# Altium PCB Matrix_Buttons_v0.0.1.PcbDoc
Units mm, origin at the board's own origin, x right, y up, seen from the top; angles counter-clockwise.
Board outline 100.01 x 80 mm, 2 copper layers (Top Layer, Bottom Layer), stack 0.471 mm thick; 50 components, 14 nets, 210 pads, 56 vias.
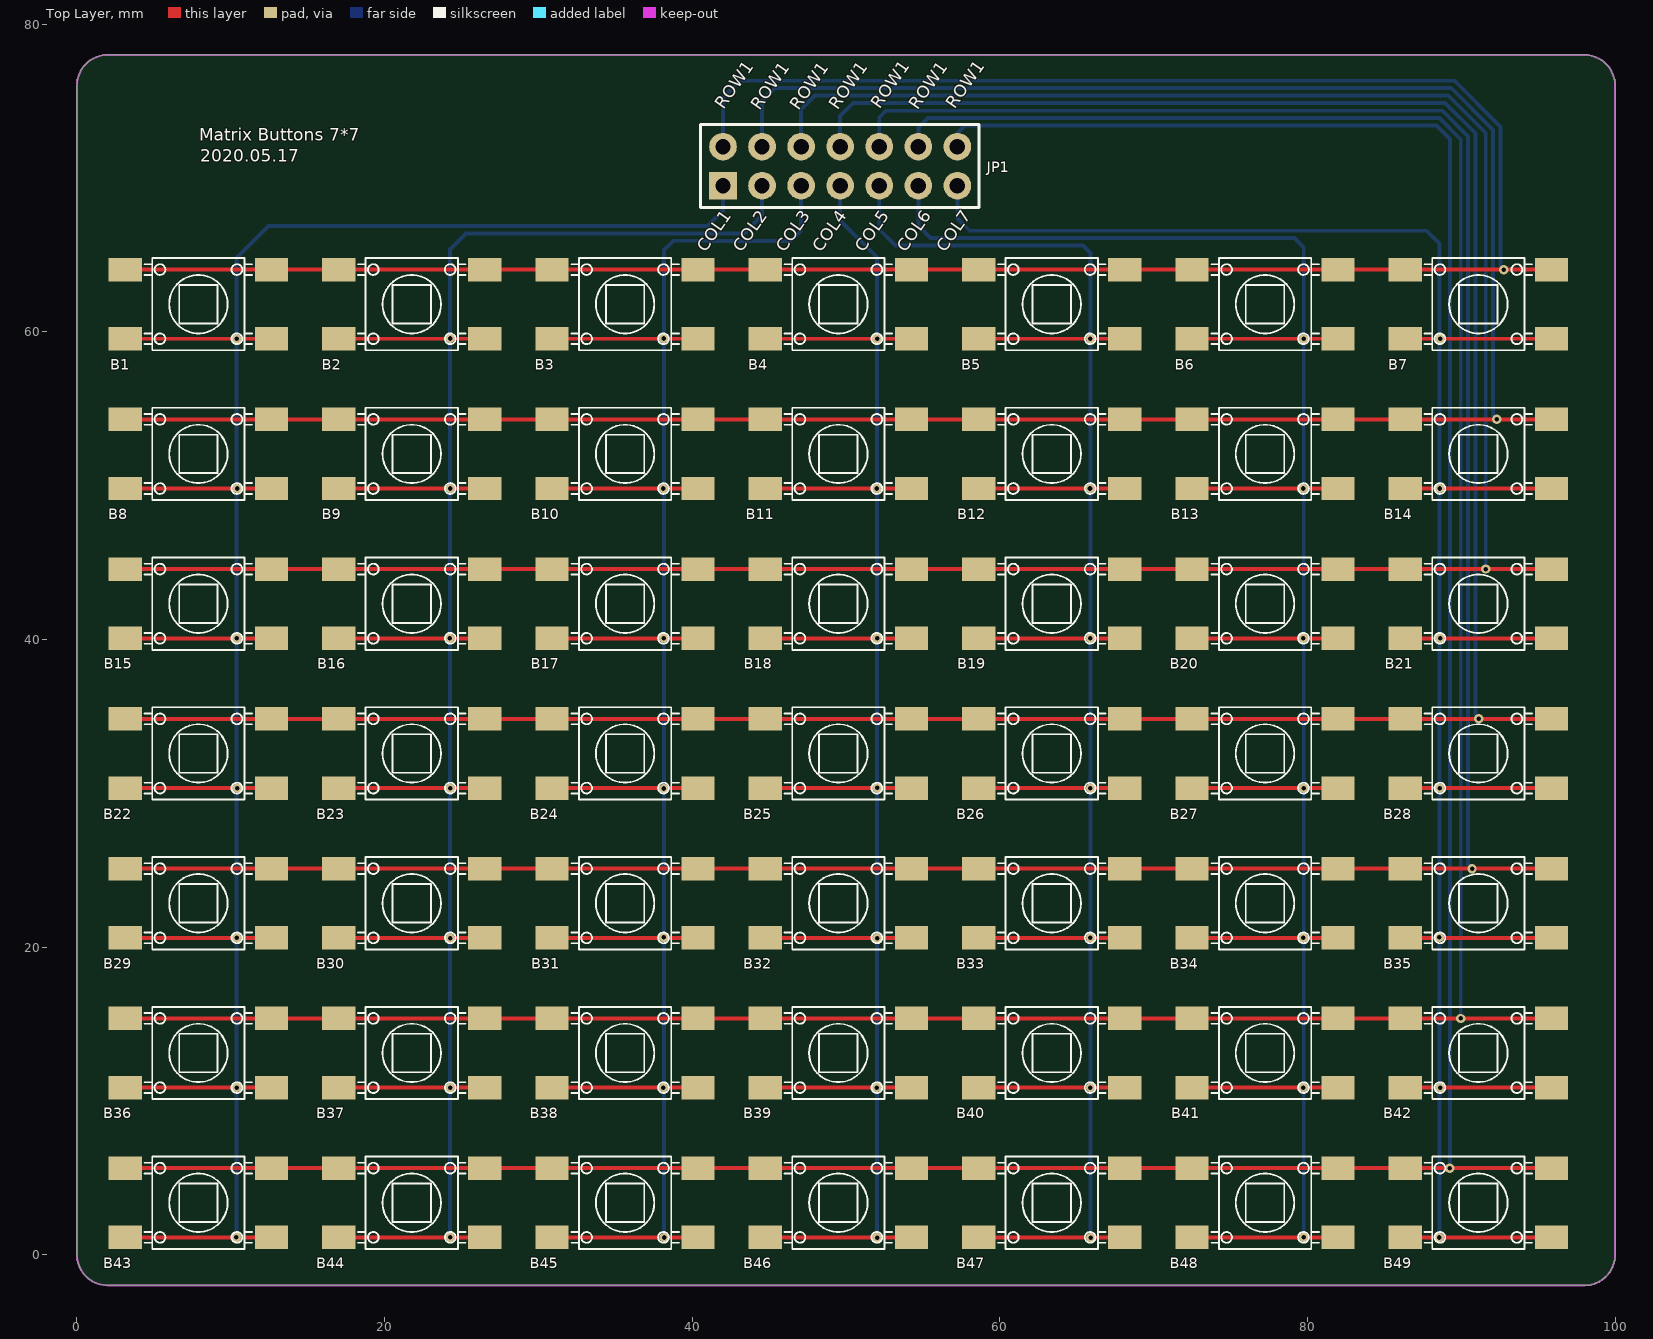
[diagram p0: Top Layer view]
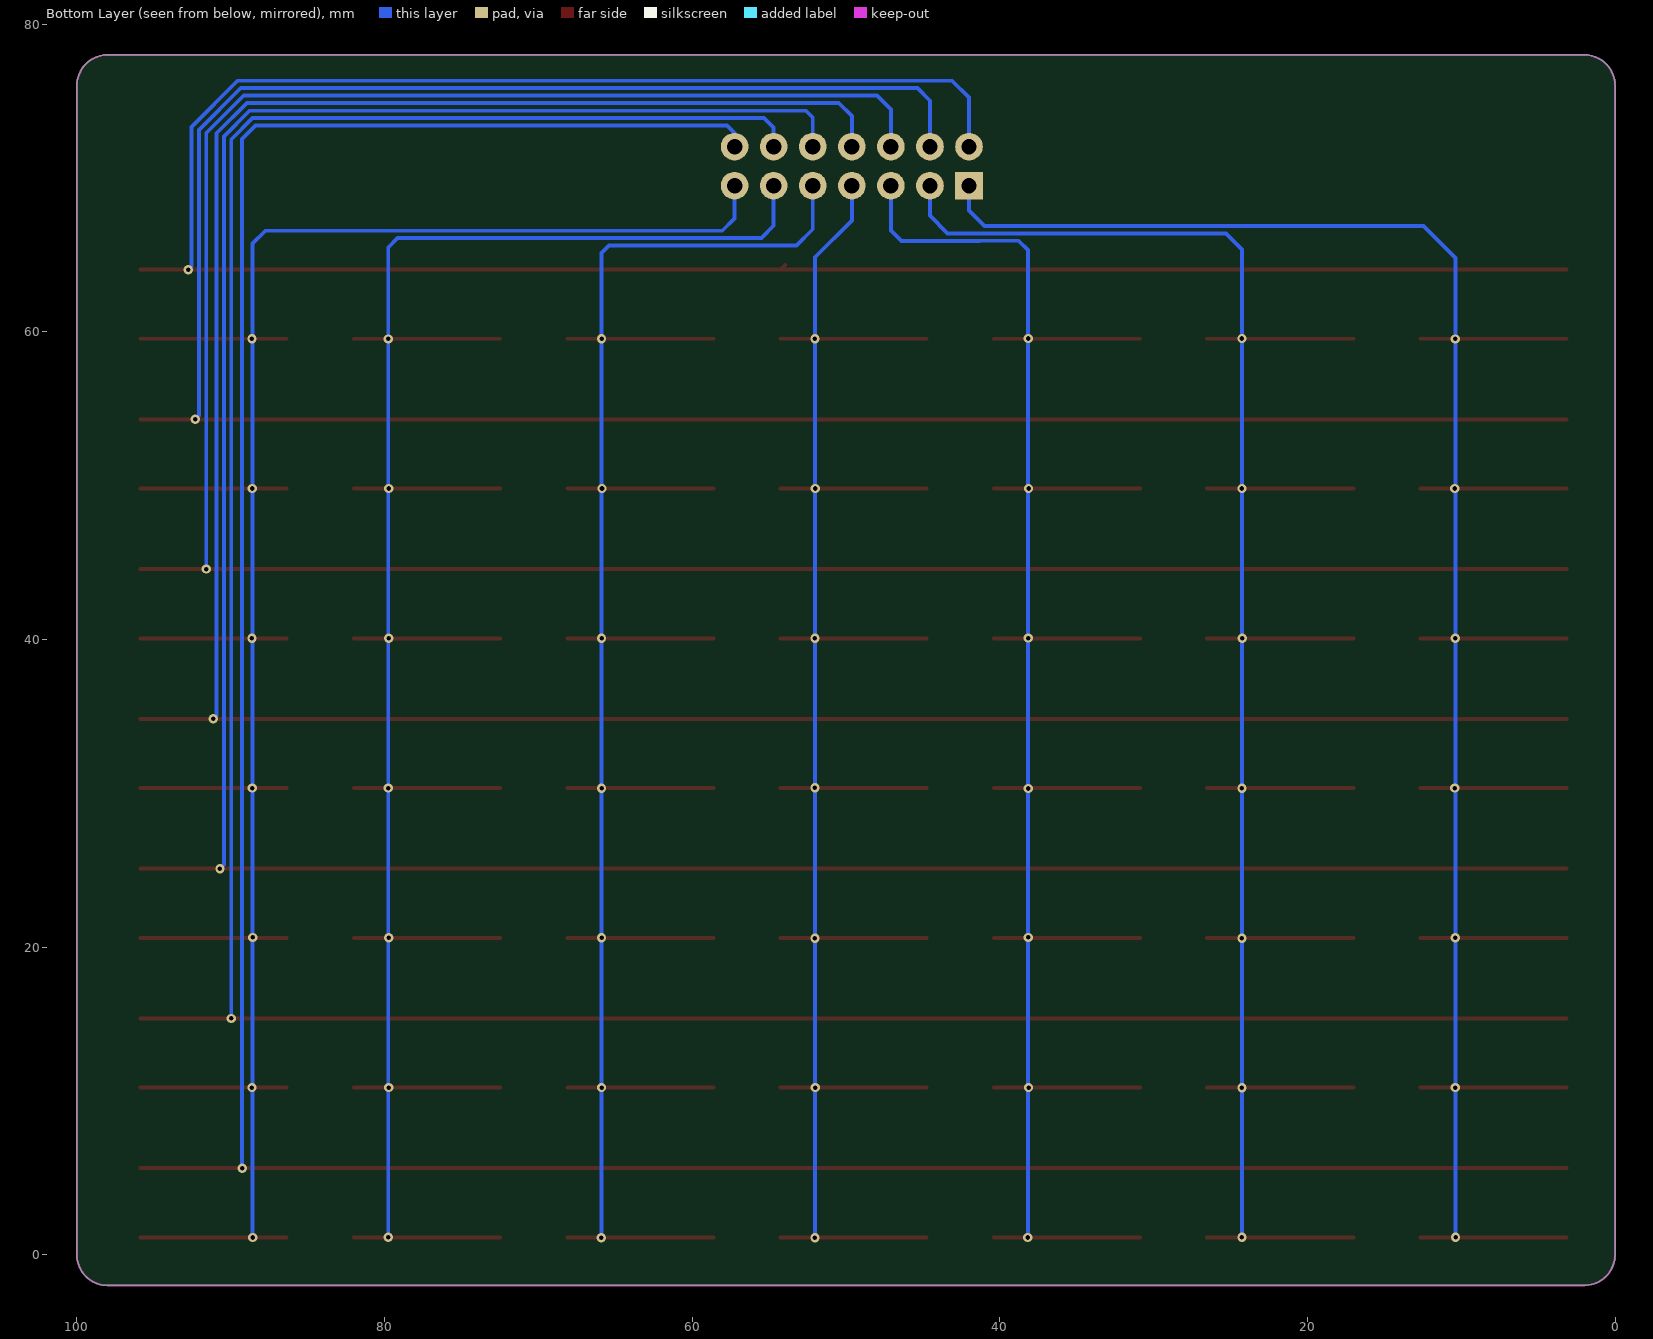
[diagram p1: Bottom Layer view, seen from below]
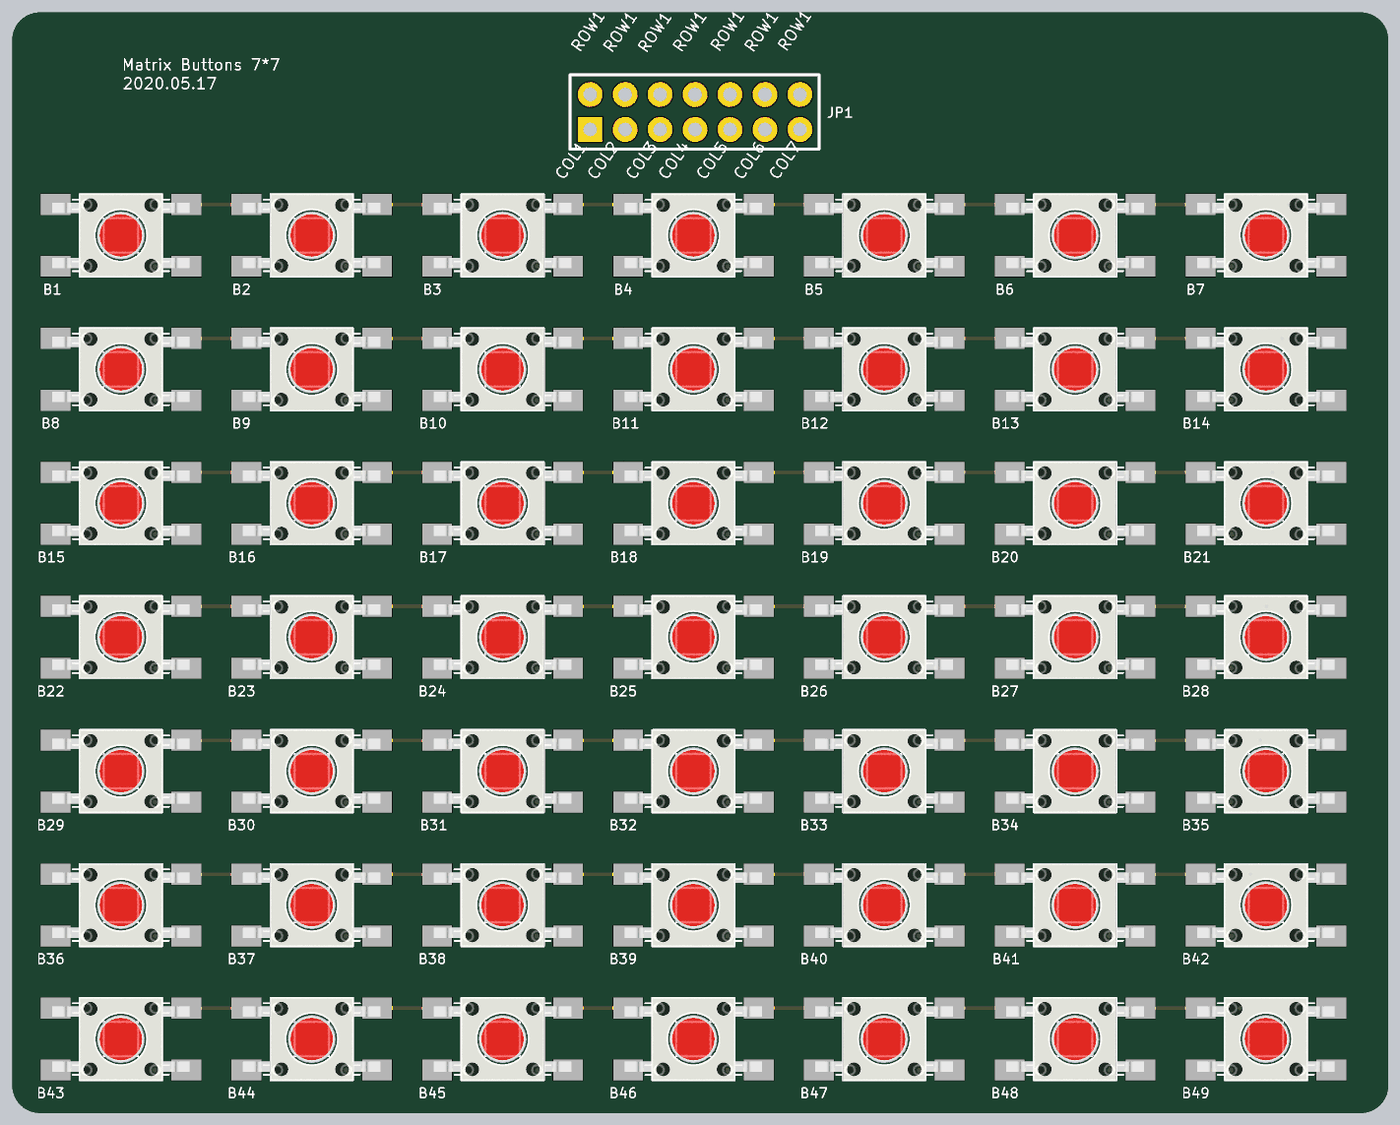
[diagram p2: 3D render of the assembled board from above, using the file's embedded part models]

## Layer stack, top to bottom
Top Solder: solder mask 0.0102, Solder Resist, Dk 3.5
Top Layer: signal copper 0.0356
Dielectric1: core 0.4, FR-4, Dk 4.8
Bottom Layer: signal copper 0.0356
Bottom Solder: solder mask 0.0102, Solder Resist, Dk 3.5

## Board outline
-0.005,0 -0.005,76 -0.004,76 cw(c1.996,76) 1.996,78 98,78 cw(c98,76) 100,76 100,-0.004 cw(c98,-0.004) 98,-2.004 1.996,-2.004 2,-2 cw(c2,0)

## Design rules (kind name [scope] priority, off if disabled: settings)
Clearance "U9 PWR TRACK" [(ObjectKind = 'Track') vs (ObjectKind = 'Pad') And (Component = 'U9')] p1: gap=0.203
Clearance "U8 PWR TRACK" [(ObjectKind = 'Track') vs (ObjectKind = 'Pad') And (Component = 'U8')] p2: gap=0.203
Clearance SB [(HasFootprint('SB_0603')) or (HasFootprint('JP2_SMD'))] p3: gap=0.127
Clearance CN1_PAD [(ObjectKind = 'Pad') And (Component = 'CN1') vs (ObjectKind = 'Pad') And (Component = 'CN1')] p4: gap=0.203
Clearance U6_PAD [(ObjectKind = 'Pad') And (Component = 'D6') vs (ObjectKind = 'Pad') And (Component = 'D6')] p5: gap=0.203
Clearance CN13_PAD [(ObjectKind = 'Pad') And (Component = 'CN13') vs (ObjectKind = 'Pad') And (Component = 'CN13')] p6: gap=0.178
Clearance U9_PAD [(ObjectKind = 'Pad') And (Component = 'U9') vs (ObjectKind = 'Pad') And (Component = 'U9')] p7: gap=0.203
Clearance U8_PAD [(ObjectKind = 'Pad') And (Component = 'U8') vs (ObjectKind = 'Pad') And (Component = 'U8')] p8: gap=0.198
Clearance Polygon [(ObjectKind = 'Poly')] p9: gap=0.254
Clearance [All] p10: gap=0.226
DiffPairsRouting [All] p1: maxlimit=0.254 minlimit=0.226 mostfreqgap=0.226 toplayer_minwidth=0.381 toplayer_maxwidth=0.381 toplayer_prefwidth=0.381 bottomlayer_minwidth=0.381 bottomlayer_maxwidth=0.381 bottomlayer_prefwidth=0.381 maxuncoupledlength=12.7
FabricationTestPointUsage TestPointUsage [All] p1: valid=0 allowmultiple=FALSE
FabricationTestpoint Testpoint [(IsPad And (OnTopLayer Or OnBottomLayer))] p1: side=3 testpointundercomponent=TRUE minsize=1.016 maxsize=2.54 preferedsize=1.524 minholesize=0 maxholesize=1.016 preferedholesize=0.813 testpointgrid=0.025 allowsidetop=TRUE allowsidebottom=TRUE usegrid=TRUE gridtolerance=0
HoleSize [All] p1: absolutevalues=TRUE maxlimit=3.81 minlimit=0.025 maxpercent=80.000 minpercent=20.000
MinimumSolderMaskSliver [All] p1: minsoldermaskwidth=0.013
PolygonConnect VBAT [(ObjectKind = 'Poly') And (Net = 'VBAT')] p1: connectstyle=Direct reliefconductorwidth=0.254 reliefentries=4 polygonreliefangle="90 Angle" airgapwidth=0.254
PolygonConnect VDD [(ObjectKind = 'Poly') And (Net = 'VDD')] p2: connectstyle=Direct reliefconductorwidth=0.254 reliefentries=4 polygonreliefangle="90 Angle" airgapwidth=0.254
PolygonConnect VIN [(ObjectKind = 'Poly') And (Net = 'VIN')] p3: connectstyle=Direct reliefconductorwidth=0.254 reliefentries=4 polygonreliefangle="90 Angle" airgapwidth=0.254
PolygonConnect +3V3 [(ObjectKind = 'Poly') And (Net = '+3V3')] p4: connectstyle=Direct reliefconductorwidth=0.254 reliefentries=4 polygonreliefangle="90 Angle" airgapwidth=0.254
PolygonConnect E5V [(ObjectKind = 'Poly') And (Net = 'E5V')] p5: connectstyle=Direct reliefconductorwidth=0.254 reliefentries=4 polygonreliefangle="90 Angle" airgapwidth=0.254
PolygonConnect +5V [(ObjectKind = 'Poly') And (Net = '+5V')] p6: connectstyle=Direct reliefconductorwidth=0.254 reliefentries=4 polygonreliefangle="90 Angle" airgapwidth=0.254
PolygonConnect U5V [(ObjectKind = 'Poly') And (Net = 'NetC17_2')] p7: connectstyle=Direct reliefconductorwidth=0.254 reliefentries=4 polygonreliefangle="90 Angle" airgapwidth=0.254
PolygonConnect VIA [IsVia] p8: connectstyle=Direct reliefconductorwidth=0.508 reliefentries=4 polygonreliefangle="90 Angle" airgapwidth=0.254
PolygonConnect [All] p9: connectstyle=Relief reliefconductorwidth=0.254 reliefentries=4 polygonreliefangle="90 Angle" airgapwidth=0.254
RoomDefinition Matrix_Buttons_v0.0.1 [InComponentClass('Matrix_Buttons_v0.0.1')] p1: confinementstyle=ConfineIn formatcopy=TRUE lockcomponents=FALSE outline -1249.589,-912.916 -1198.789,-912.916 -1198.789,-887.516 -1249.589,-887.516
RoutingLayers [All] p1: top layer_v5=FALSE bottom layer_v5=FALSE
RoutingVias [All] p1: holewidth=0.305 width=0.508 viastyle="Through Hole" minholewidth=0.203 minwidth=0.381 maxholewidth=0.711 maxwidth=1.27
SilkToSilkClearance [All] p1: silktosilkclearance=0.102
SilkToSolderMaskClearance SilkscreenOverComponentPads [IsPad] p1: minsilkscreentomaskgap=0.102 clearancetoexposedcopper=TRUE
SolderMaskExpansion [All] p1: expansion=0.102
Width PWR [InNetClass('PWR')] p1: maxlimit=2.54 minlimit=0.203 preferedwidth=0.254 bottomlayer_minwidth=0.254 minimp=50.000000 maximp=50.000000 favimp=50.000000
Width [All] p2: maxlimit=2.54 minlimit=0.127 preferedwidth=0.254 minimp=50.000000 maximp=50.000000 favimp=50.000000
22 further rules are at their usual default settings.

## Components (designator, comment, footprint, x,y, rotation, side; value= is the part's Value field where it differs from the comment)
B1 "SW-PUSH-CMS_BLACK" "SWI_WEALTHMETAL_TD-0341_4P - BACK" 7.896,61.793 r270 top
B2 "SW-PUSH-CMS_BLACK" "SWI_WEALTHMETAL_TD-0341_4P - BACK" 21.765,61.793 r270 top
B3 "SW-PUSH-CMS_BLACK" "SWI_WEALTHMETAL_TD-0341_4P - BACK" 35.634,61.793 r270 top
B4 "SW-PUSH-CMS_BLACK" "SWI_WEALTHMETAL_TD-0341_4P - BACK" 49.503,61.793 r270 top
B5 "SW-PUSH-CMS_BLACK" "SWI_WEALTHMETAL_TD-0341_4P - BACK" 63.371,61.793 r270 top
B6 "SW-PUSH-CMS_BLACK" "SWI_WEALTHMETAL_TD-0341_4P - BACK" 77.24,61.793 r270 top
B7 "SW-PUSH-CMS_BLACK" "SWI_WEALTHMETAL_TD-0341_4P - BACK" 91.109,61.793 r270 top
B8 "SW-PUSH-CMS_BLACK" "SWI_WEALTHMETAL_TD-0341_4P - BACK" 7.896,52.057 r270 top
B9 "SW-PUSH-CMS_BLACK" "SWI_WEALTHMETAL_TD-0341_4P - BACK" 21.765,52.057 r270 top
B10 "SW-PUSH-CMS_BLACK" "SWI_WEALTHMETAL_TD-0341_4P - BACK" 35.634,52.057 r270 top
B11 "SW-PUSH-CMS_BLACK" "SWI_WEALTHMETAL_TD-0341_4P - BACK" 49.503,52.057 r270 top
B12 "SW-PUSH-CMS_BLACK" "SWI_WEALTHMETAL_TD-0341_4P - BACK" 63.371,52.057 r270 top
B13 "SW-PUSH-CMS_BLACK" "SWI_WEALTHMETAL_TD-0341_4P - BACK" 77.24,52.057 r270 top
B14 "SW-PUSH-CMS_BLACK" "SWI_WEALTHMETAL_TD-0341_4P - BACK" 91.109,52.057 r270 top
B15 "SW-PUSH-CMS_BLACK" "SWI_WEALTHMETAL_TD-0341_4P - BACK" 7.896,42.32 r270 top
B16 "SW-PUSH-CMS_BLACK" "SWI_WEALTHMETAL_TD-0341_4P - BACK" 21.765,42.32 r270 top
B17 "SW-PUSH-CMS_BLACK" "SWI_WEALTHMETAL_TD-0341_4P - BACK" 35.634,42.32 r270 top
B18 "SW-PUSH-CMS_BLACK" "SWI_WEALTHMETAL_TD-0341_4P - BACK" 49.503,42.32 r270 top
B19 "SW-PUSH-CMS_BLACK" "SWI_WEALTHMETAL_TD-0341_4P - BACK" 63.371,42.32 r270 top
B20 "SW-PUSH-CMS_BLACK" "SWI_WEALTHMETAL_TD-0341_4P - BACK" 77.24,42.32 r270 top
B21 "SW-PUSH-CMS_BLACK" "SWI_WEALTHMETAL_TD-0341_4P - BACK" 91.109,42.32 r270 top
B22 "SW-PUSH-CMS_BLACK" "SWI_WEALTHMETAL_TD-0341_4P - BACK" 7.896,32.583 r270 top
B23 "SW-PUSH-CMS_BLACK" "SWI_WEALTHMETAL_TD-0341_4P - BACK" 21.765,32.583 r270 top
B24 "SW-PUSH-CMS_BLACK" "SWI_WEALTHMETAL_TD-0341_4P - BACK" 35.634,32.583 r270 top
B25 "SW-PUSH-CMS_BLACK" "SWI_WEALTHMETAL_TD-0341_4P - BACK" 49.503,32.583 r270 top
B26 "SW-PUSH-CMS_BLACK" "SWI_WEALTHMETAL_TD-0341_4P - BACK" 63.371,32.583 r270 top
B27 "SW-PUSH-CMS_BLACK" "SWI_WEALTHMETAL_TD-0341_4P - BACK" 77.24,32.583 r270 top
B28 "SW-PUSH-CMS_BLACK" "SWI_WEALTHMETAL_TD-0341_4P - BACK" 91.109,32.583 r270 top
B29 "SW-PUSH-CMS_BLACK" "SWI_WEALTHMETAL_TD-0341_4P - BACK" 7.896,22.847 r270 top
B30 "SW-PUSH-CMS_BLACK" "SWI_WEALTHMETAL_TD-0341_4P - BACK" 21.765,22.847 r270 top
B31 "SW-PUSH-CMS_BLACK" "SWI_WEALTHMETAL_TD-0341_4P - BACK" 35.634,22.847 r270 top
B32 "SW-PUSH-CMS_BLACK" "SWI_WEALTHMETAL_TD-0341_4P - BACK" 49.503,22.847 r270 top
B33 "SW-PUSH-CMS_BLACK" "SWI_WEALTHMETAL_TD-0341_4P - BACK" 63.371,22.847 r270 top
B34 "SW-PUSH-CMS_BLACK" "SWI_WEALTHMETAL_TD-0341_4P - BACK" 77.24,22.847 r270 top
B35 "SW-PUSH-CMS_BLACK" "SWI_WEALTHMETAL_TD-0341_4P - BACK" 91.109,22.847 r270 top
B36 "SW-PUSH-CMS_BLACK" "SWI_WEALTHMETAL_TD-0341_4P - BACK" 7.896,13.11 r270 top
B37 "SW-PUSH-CMS_BLACK" "SWI_WEALTHMETAL_TD-0341_4P - BACK" 21.765,13.11 r270 top
B38 "SW-PUSH-CMS_BLACK" "SWI_WEALTHMETAL_TD-0341_4P - BACK" 35.634,13.11 r270 top
B39 "SW-PUSH-CMS_BLACK" "SWI_WEALTHMETAL_TD-0341_4P - BACK" 49.503,13.11 r270 top
B40 "SW-PUSH-CMS_BLACK" "SWI_WEALTHMETAL_TD-0341_4P - BACK" 63.371,13.11 r270 top
B41 "SW-PUSH-CMS_BLACK" "SWI_WEALTHMETAL_TD-0341_4P - BACK" 77.24,13.11 r270 top
B42 "SW-PUSH-CMS_BLACK" "SWI_WEALTHMETAL_TD-0341_4P - BACK" 91.109,13.11 r270 top
B43 "SW-PUSH-CMS_BLACK" "SWI_WEALTHMETAL_TD-0341_4P - BACK" 7.896,3.373 r270 top
B44 "SW-PUSH-CMS_BLACK" "SWI_WEALTHMETAL_TD-0341_4P - BACK" 21.765,3.373 r270 top
B45 "SW-PUSH-CMS_BLACK" "SWI_WEALTHMETAL_TD-0341_4P - BACK" 35.634,3.373 r270 top
B46 "SW-PUSH-CMS_BLACK" "SWI_WEALTHMETAL_TD-0341_4P - BACK" 49.503,3.373 r270 top
B47 "SW-PUSH-CMS_BLACK" "SWI_WEALTHMETAL_TD-0341_4P - BACK" 63.371,3.373 r270 top
B48 "SW-PUSH-CMS_BLACK" "SWI_WEALTHMETAL_TD-0341_4P - BACK" 77.24,3.373 r270 top
B49 "SW-PUSH-CMS_BLACK" "SWI_WEALTHMETAL_TD-0341_4P - BACK" 91.109,3.373 r270 top
JP1 "HEADER_2X7" "Header M 2x7x2.54 TH V" 42,69.494 r0 top

## Footprints (in the part's own frame and the unit in brackets; to place one, negate y for a bottom-side part, rotate by r counter-clockwise, add the part's x,y. Pads: shape width x height; smd on the part's side, far side on the other; paste and mask are expansions set on the pad)
"Header M 2x7x2.54 TH V" [mm] "2x5x2.54 Header TH V Male"
  rect 1.8x1.8 hole 1: 1(0,0)
  round 1.8 hole 1: 2(0,2.54) 3(2.54,0) 4(2.54,2.54) 5(5.08,0) 6(5.08,2.54) 7(7.62,0) 8(7.62,2.54) 9(10.16,0) 10(10.16,2.54) 11(12.7,0) 12(12.7,2.54) 13(15.24,0) 14(15.24,2.54)
  silkscreen extent -1.47,-1.43 16.64,3.97
"SWI_WEALTHMETAL_TD-0341_4P - BACK" [mm] "SMD Push Button with Back Plastic"
  rect 1.52x2.16 smd mask+0.05: 1(-2.25,4.75) 1(-2.25,-4.75) 2(2.25,4.75) 2(2.25,-4.75)
  silkscreen extent -3,-3.5 3,3.5, body extent -3,-5 3,5, height 6

## Part data
B1 B2 B3 B4 B5 B6 B7 B8 B9 B10 B11 B12 B13 B14 B15 B16 B17 B18 B19 B20 B21 B22 B23 B24 B25 B26 B27 B28 B29 B30 B31 B32 B33 B34 B35 B36 B37 B38 B39 B40 B41 B42 B43 B44 B45 B46 B47 B48 B49: library part SW-PB_2, "Push-button SMD"

## Via types
v1: diameter 0.6, hole 0.3, Top Layer to Bottom Layer, tented both sides, 56 vias

## Nets (pads, with @x,y where several pads share a name; then routed paths per layer and width w, separated by ;. In a path a pad name is that pad's centre, name@x,y a point inside that pad or via, vN(x,y) a via of type N, cw(c..) or ccw(c..) an arc to the next point about the centre after c; other vN are vias at no path point)
KEY_COL1: B1.2 B8.2 B15.2 B22.2 B29.2 B36.2 B43.2 JP1.1 | length 164.7
  Top Layer w0.254: B43.2@3.146,1.123 v1(10.363,1.123) B43.2@12.646,1.123 ; B36.2@3.146,10.86 v1(10.389,10.86) B36.2@12.646,10.86 ; B29.2@3.146,20.597 v1(10.389,20.597) B29.2@12.646,20.597 ; B22.2@3.146,30.333 v1(10.414,30.333) B22.2@12.646,30.333 ; B15.2@3.146,40.07 v1(10.389,40.07) B15.2@12.646,40.07 ; B8.2@3.146,49.807 v1(10.414,49.807) B8.2@12.646,49.807 ; B1.2@3.146,59.543 B1.2@12.646,59.543
  Bottom Layer w0.254: v1(10.363,1.123) 10.363,10.86 10.363,49.807 10.363,64.795 12.446,66.878 40.996,66.878 42,67.883 JP1.1
  other v1: 10.389,59.538
KEY_COL2: B2.2 B9.2 B16.2 B23.2 B30.2 B37.2 B44.2 JP1.3 | length 153.9
  Top Layer w0.254: B44.2@17.015,1.123 v1(24.257,1.123) B44.2@26.515,1.123 ; B37.2@17.015,10.86 B37.2@26.515,10.86 ; B30.2@17.015,20.597 B30.2@26.515,20.597 ; B23.2@17.015,30.333 B23.2@26.515,30.333 ; B16.2@17.015,40.07 v1(24.232,40.07) B16.2@26.515,40.07 ; B9.2@17.015,49.807 B9.2@26.515,49.807 ; B2.2@17.015,59.543 B2.2@26.515,59.543
  Bottom Layer w0.254: v1(24.257,1.123) v1(24.257,10.849) v1(24.257,20.574) v1(24.257,30.328) v1(24.257,49.809) v1(24.257,59.563) 24.257,65.354 25.301,66.398 43.386,66.398 44.54,67.552 JP1.3
KEY_COL3: B3.2 B10.2 B17.2 B24.2 B31.2 B38.2 B45.2 JP1.5 | length 143.1
  Top Layer w0.254: B45.2@30.884,1.123 B45.2@40.384,1.123 ; B38.2@30.884,10.86 v1(38.125,10.86) B38.2@40.384,10.86 ; B31.2@30.884,20.597 B31.2@40.384,20.597 ; B24.2@30.884,30.333 B24.2@40.384,30.333 ; B17.2@30.884,40.07 B17.2@40.384,40.07 ; B10.2@30.884,49.807 B10.2@40.384,49.807 ; B3.2@30.884,59.543 B3.2@40.384,59.543
  Bottom Layer w0.254: v1(38.176,1.118) 38.176,20.625 38.176,65.303 38.791,65.918 41.28,65.918 41.311,65.888 46.38,65.888 47.08,66.587 JP1.5
  other v1: 38.151,20.625 38.151,30.302 38.151,40.081 38.125,49.809 38.151,59.563
KEY_COL4: B4.2 B11.2 B18.2 B25.2 B32.2 B39.2 B46.2 JP1.7 | length 135.9
  Top Layer w0.254: B46.2@44.753,1.123 B46.2@54.253,1.123 ; B39.2@44.753,10.86 v1(51.994,10.86) B39.2@54.253,10.86 ; B32.2@44.753,20.597 B32.2@54.253,20.597 ; B25.2@44.753,30.333 B25.2@54.253,30.333 ; B18.2@44.753,40.07 v1(52.019,40.07) B18.2@54.253,40.07 ; B11.2@44.753,49.807 v1(51.994,49.807) B11.2@54.253,49.807 ; B4.2@44.753,59.543 v1(52.019,59.543) B4.2@54.253,59.543
  Bottom Layer w0.254: JP1.7 49.62,67.245 52.019,64.846 v1(52.019,59.543) v1(52.019,40.07) v1(52.019,30.353) v1(52.019,20.574) v1(52.019,1.092)
KEY_COL5: B5.2 B12.2 B19.2 B26.2 B33.2 B40.2 B47.2 JP1.9 | length 147.7
  Top Layer w0.254: B47.2@58.621,1.123 B47.2@68.121,1.123 ; B40.2@58.621,10.86 B40.2@68.121,10.86 ; B33.2@58.621,20.597 B33.2@68.121,20.597 ; B26.2@58.621,30.333 B26.2@68.121,30.333 ; B19.2@58.621,40.07 v1(65.888,40.07) B19.2@68.121,40.07 ; B12.2@58.621,49.807 v1(65.862,49.807) B12.2@68.121,49.807 ; B5.2@58.621,59.543 v1(65.888,59.543) B5.2@68.121,59.543
  Bottom Layer w0.254: JP1.9 52.16,66.661 53.213,65.608 65.405,65.608 65.888,65.126 v1(65.888,59.543) v1(65.888,40.07) v1(65.888,30.328) v1(65.888,20.599) v1(65.888,10.858) 65.888,1.118 v1(65.913,1.092)
KEY_COL6: B6.2 B13.2 B20.2 B27.2 B34.2 B41.2 B48.2 JP1.11 | length 159.1
  Top Layer w0.254: B48.2@72.49,1.123 v1(79.756,1.123) B48.2@81.99,1.123 ; B41.2@72.49,10.86 v1(79.731,10.86) B41.2@81.99,10.86 ; B34.2@72.49,20.597 v1(79.731,20.597) B34.2@81.99,20.597 ; B27.2@72.49,30.333 v1(79.756,30.333) B27.2@81.99,30.333 ; B20.2@72.49,40.07 v1(79.731,40.07) B20.2@81.99,40.07 ; B13.2@72.49,49.807 v1(79.731,49.807) B13.2@81.99,49.807 ; B6.2@72.49,59.543 B6.2@81.99,59.543
  Bottom Layer w0.254: JP1.11 54.7,66.89 55.502,66.088 79.149,66.088 79.756,65.481 v1(79.756,59.538) v1(79.756,30.333) v1(79.756,1.123)
KEY_COL7: B7.2 B14.2 B21.2 B28.2 B35.2 B42.2 B49.2 JP1.13 | length 165.2
  Top Layer w0.254: B49.2@86.359,1.123 B49.2@95.859,1.123 ; B42.2@86.359,10.86 v1(88.621,10.86) B42.2@95.859,10.86 ; B35.2@86.359,20.597 B35.2@95.859,20.597 ; B28.2@86.359,30.333 v1(88.595,30.333) B28.2@95.859,30.333 ; B21.2@86.359,40.07 v1(88.621,40.07) B21.2@95.859,40.07 ; B14.2@86.359,49.807 v1(88.595,49.807) B14.2@95.859,49.807 ; B7.2@86.359,59.543 v1(88.621,59.543) B7.2@95.859,59.543
  Bottom Layer w0.254: JP1.13 57.24,67.372 58.044,66.568 87.737,66.568 88.57,65.735 88.57,40.07 v1(88.57,20.625) v1(88.57,1.118)
KEY_ROW1: B1.1 B2.1 B3.1 B4.1 B5.1 B6.1 B7.1 JP1.2 | length 157.9
  Top Layer w0.254: B1.1@3.146,64.043 12.646,64.043 17.015,64.043 26.515,64.043 30.884,64.043 40.384,64.043 44.753,64.043 B4.1@54.253,64.043 ; B4.1@53.95,64.346 B4.1@54.253,64.043 ; B7.1@95.859,64.043 86.359,64.043 81.99,64.043 72.49,64.043 68.121,64.043 58.621,64.043 B4.1@54.253,64.043
  Bottom Layer w0.254: JP1.2 42,75.223 43.096,76.319 89.547,76.319 92.553,73.314 92.553,64.242 v1(92.761,64.033)
KEY_ROW2: B8.1 B9.1 B10.1 B11.1 B12.1 B13.1 B14.1 JP1.4 | length 163.6
  Top Layer w0.254: B8.1@3.146,54.307 12.646,54.307 17.015,54.307 26.515,54.307 30.884,54.307 40.384,54.307 44.753,54.307 54.253,54.307 58.621,54.307 68.121,54.307 72.49,54.307 81.99,54.307 86.359,54.307 B14.1@95.859,54.307
  Bottom Layer w0.254: JP1.4 44.54,75.02 45.359,75.839 89.348,75.839 92.072,73.115 92.072,54.536 v1(92.304,54.305)
KEY_ROW3: B15.1 B16.1 B17.1 B18.1 B19.1 B20.1 B21.1 JP1.6 | length 169.4
  Top Layer w0.254: B15.1@3.146,44.57 12.646,44.57 17.015,44.57 26.515,44.57 30.884,44.57 40.384,44.57 44.753,44.57 54.253,44.57 58.621,44.57 68.121,44.57 72.49,44.57 81.99,44.57 86.359,44.57 v1(91.592,44.57) B21.1@95.859,44.57
  Bottom Layer w0.254: JP1.6 47.08,74.461 47.978,75.359 89.15,75.359 91.592,72.917 v1(91.592,44.57)
KEY_ROW4: B22.1 B23.1 B24.1 B25.1 B26.1 B27.1 B28.1 JP1.8 | length 175.3
  Top Layer w0.254: B22.1@3.146,34.833 12.646,34.833 17.015,34.833 26.515,34.833 30.884,34.833 40.384,34.833 44.753,34.833 54.253,34.833 58.621,34.833 68.121,34.833 72.49,34.833 81.99,34.833 86.359,34.833 v1(91.135,34.833) B28.1@95.859,34.833
  Bottom Layer w0.254: JP1.8 49.62,74.029 50.47,74.879 88.951,74.879 90.927,72.903 90.927,35.042 v1(91.135,34.833)
KEY_ROW5: B29.1 B30.1 B31.1 B32.1 B33.1 B34.1 B35.1 JP1.10 | length 181.5
  Top Layer w0.254: B29.1@3.146,25.097 12.646,25.097 17.015,25.097 26.515,25.097 30.884,25.097 40.384,25.097 44.753,25.097 54.253,25.097 58.621,25.097 68.121,25.097 72.49,25.097 81.99,25.097 86.359,25.097 B35.1@95.859,25.097
  Bottom Layer w0.254: JP1.10 52.16,73.925 52.603,74.369 88.782,74.369 90.447,72.704 90.447,25.352 v1(90.703,25.095)
KEY_ROW6: B36.1 B37.1 B38.1 B39.1 B40.1 B41.1 B42.1 JP1.12 | length 187.2
  Top Layer w0.254: B36.1@3.146,15.36 12.646,15.36 17.015,15.36 26.515,15.36 30.884,15.36 40.384,15.36 44.753,15.36 54.253,15.36 58.621,15.36 68.121,15.36 72.49,15.36 81.99,15.36 86.359,15.36 v1(89.967,15.36) B42.1@95.859,15.36
  Bottom Layer w0.254: JP1.12 54.7,73.267 55.321,73.889 88.584,73.889 89.967,72.505 v1(89.967,15.36)
KEY_ROW7: B43.1 B44.1 B45.1 B46.1 B47.1 B48.1 B49.1 JP1.14 | length 193.1
  Top Layer w0.254: B43.1@3.146,5.623 12.646,5.623 17.015,5.623 26.515,5.623 30.884,5.623 40.384,5.623 44.753,5.623 54.253,5.623 58.621,5.623 68.121,5.623 72.49,5.623 81.99,5.623 86.359,5.623 v1(89.256,5.623) B49.1@95.859,5.623
  Bottom Layer w0.254: JP1.14 57.24,72.914 57.734,73.409 88.385,73.409 89.274,72.52 89.274,59.273 89.256,59.255 89.256,40.359 89.274,40.34 89.274,39.799 89.256,39.781 89.256,11.149 89.274,11.13 89.274,5.641 v1(89.256,5.623)

## Keep-outs
Keep-Out Layer:
  lines w0.127: -0.005,0 -0.005,76 ; -0.005,16.537 -0.005,30.71 -0.005,66 ; -0.004,76 cw(c1.996,76) 1.996,78 98,78 cw(c98,76) 100,76 100,-0.004 cw(c98,-0.004) 98,-2.004 1.996,-2.004 ; 0,0 ccw(c2,0) 2,-2

## Silkscreen, mask and mechanical layers (free items; w line width, h text height)
Top Overlay:
  text "ROW1" at 57.074,74.447 h0.8 r55
  text "ROW1" at 52.197,74.422 h0.8 r55
  text "ROW1" at 42.062,74.397 h0.8 r55
  text "ROW1" at 49.454,74.371 h0.8 r55
  text "ROW1" at 54.661,74.371 h0.8 r55
  text "ROW1" at 44.399,74.346 h0.8 r55
  text "ROW1" at 46.914,74.32 h0.8 r55
  text "Matrix Buttons 7*7" at 7.95,72.415 h0.8
  text "2020.05.17" at 8.001,71.044 h0.8
  text "COL1" at 40.894,65.093 h0.8 r55
  text "COL2" at 43.231,65.093 h0.8 r55
  text "COL3" at 46.025,65.093 h0.8 r55
  text "COL4" at 48.387,65.093 h0.8 r55
  text "COL5" at 51.156,65.093 h0.8 r55
  text "COL6" at 53.873,65.093 h0.8 r55
  text "COL7" at 56.439,65.093 h0.8 r55